# Altium PCB PCB2.PcbDoc
Units mil, origin at the board's own origin, x right, y up, seen from the top; angles counter-clockwise.
Board outline 6000 x 4000 mil, 2 copper layers (Top Layer, Bottom Layer); 14 components, 22 nets, 28 pads, 0 vias.
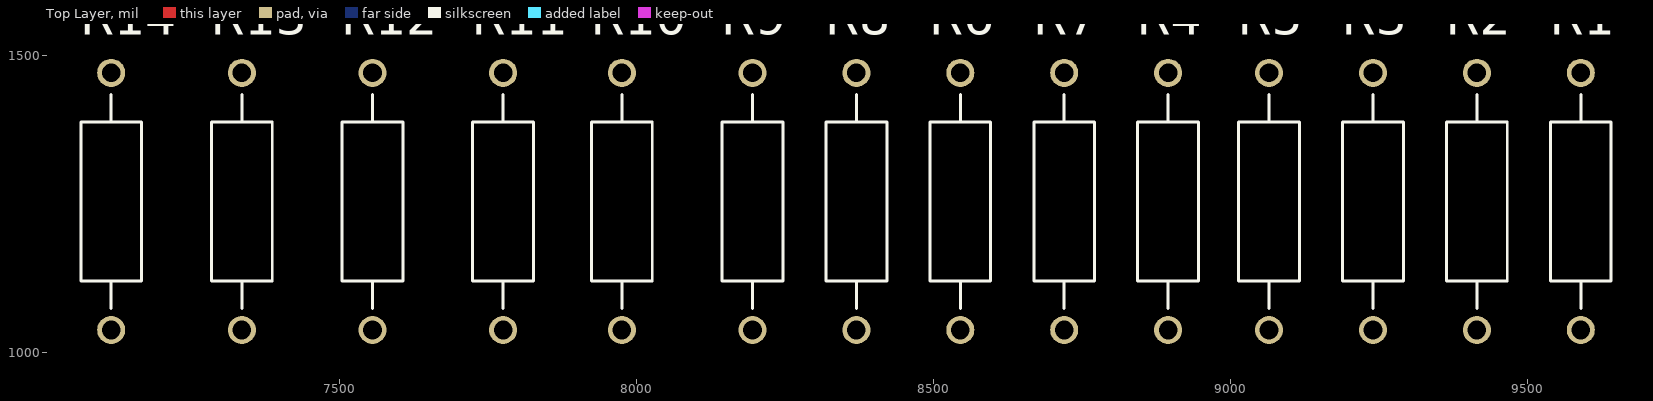
[diagram p0: Top Layer view]
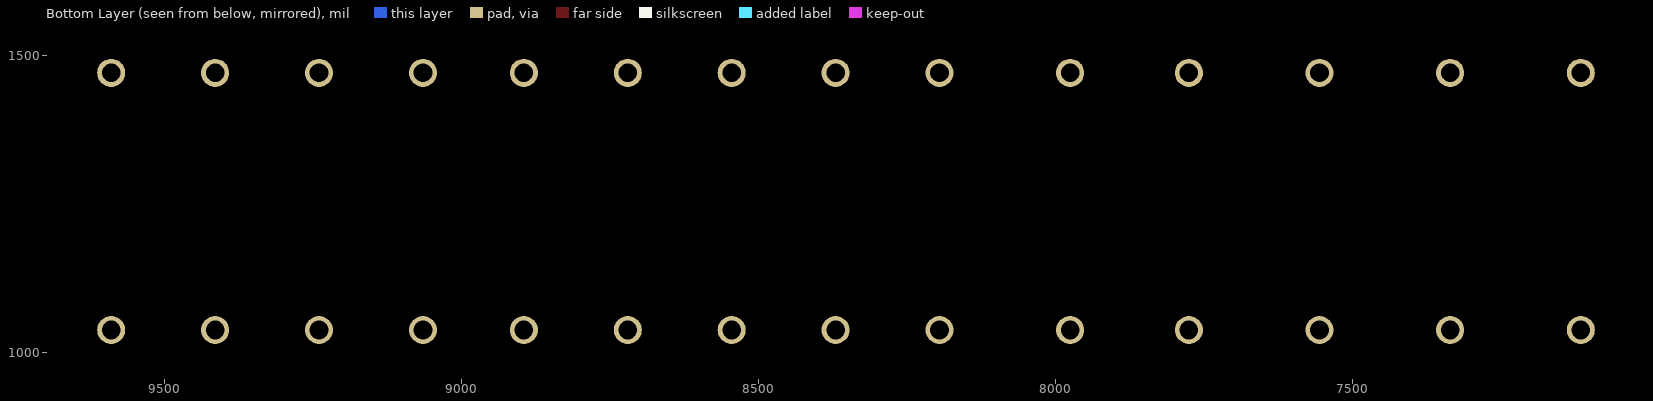
[diagram p1: Bottom Layer view, seen from below]

## Layer stack, top to bottom
Top Solder: solder mask 0.4, Solder Resist, Dk 3.5
Top Layer: signal copper 1.4
Dielectric 1: dielectric 12.6, FR-4, Dk 4.8
Bottom Layer: signal copper 1.4
Bottom Solder: solder mask 0.4, Solder Resist, Dk 3.5

## Board outline
1000,1000 7000,1000 7000,5000 1000,5000

## Design rules (kind name [scope] priority, off if disabled: settings)
Clearance [All] p1: gap=10 ignorepadtopadclearanceinfootprint=FALSE
PolygonConnect [All] p1: connectstyle=Relief reliefconductorwidth=10 reliefentries=4 polygonreliefangle="90 Angle" airgapwidth=10
RoutingVias [All] p1: holewidth=28 width=50 viastyle="Through Hole" minholewidth=28 minwidth=50 maxholewidth=28 maxwidth=50
SolderMaskExpansion [All] p1: expansion=4 istentingtop=FALSE
SupplyNets "Schematic Supply Nets" [InNet('12+')] p1: voltage=0.000
Width [All] p1: maxlimit=10 minlimit=10 preferedwidth=10
30 further rules are at their usual default settings.

## Components (designator, comment, footprint, x,y, rotation, side; value= is the part's Value field where it differs from the comment)
R1 "14.3" RESAD1100W55L680D260 9590,1255 r90 top
R2 "10k" RESAD1100W55L680D260 9415,1255 r90 top
R3 "1.5" RESAD1100W55L680D260 9240,1255 r90 top
R4 "10k" RESAD1100W55L680D260 8895,1255 r90 top
R5 "10k" RESAD1100W55L680D260 9065,1255 r90 top
R6 "330" RESAD1100W55L680D260 8545,1255 r90 top
R7 "330" RESAD1100W55L680D260 8720,1255 r90 top
R8 "MFR-25FBF52-10K" RESAD1100W55L680D260 8370,1255 r90 top
R9 "MFR-25FBF52-10K" RESAD1100W55L680D260 8195,1255 r90 top
R10 "MFR-25FBF52-10K" RESAD1100W55L680D260 7975,1255 r90 top
R11 "4.7k" RESAD1100W55L680D260 7775,1255 r90 top
R12 "MFR-25FBF52-10K" RESAD1100W55L680D260 7555,1255 r90 top
R13 "4.7k" RESAD1100W55L680D260 7335,1255 r90 top
R14 "1k" RESAD1100W55L680D260 7115,1255 r90 top

## Footprints (in the part's own frame and the unit in brackets; to place one, negate y for a bottom-side part, rotate by r counter-clockwise, add the part's x,y. Pads: shape width x height; smd on the part's side, far side on the other; paste and mask are expansions set on the pad)
RESAD1100W55L680D260 [mm]
  round 1.2 hole 0.8: 1(-5.5,0) 2(5.5,0)
  silkscreen extent -4.58,-1.3 4.58,1.3, body extent -5.77,-1.2 5.77,1.2, height 2.4

## Part data
R1 R2 R3 R4 R5 R6 R7 R11 R13 R14: library part MFR-25FBF52-10K, "10.2 kOhms Â±1% 0.25W, 1/4W Through Hole Resistor Axial - Metal Film", Package="RADIAL-2 YAGEO", Check_prices=https://www.snapeda.com/parts/MFR-25FBF52-10K/Yageo/view-part/?ref=eda, MF=Yageo, MP=MFR-25FBF52-10K, SnapEDA_Link=https://www.snapeda.com/parts/MFR-25FBF52-10K/Yageo/view-part/?ref=snap
R8 R9 R10 R12: "10.2 kOhms Â±1% 0.25W, 1/4W Through Hole Resistor Axial - Metal Film", Package="RADIAL-2 YAGEO", Check_prices=https://www.snapeda.com/parts/MFR-25FBF52-10K/Yageo/view-part/?ref=eda, MF=Yageo, MP=MFR-25FBF52-10K, SnapEDA_Link=https://www.snapeda.com/parts/MFR-25FBF52-10K/Yageo/view-part/?ref=snap

## Nets (pads, with @x,y where several pads share a name; then routed paths per layer and width w, separated by ;. In a path a pad name is that pad's centre, name@x,y a point inside that pad or via, vN(x,y) a via of type N, cw(c..) or ccw(c..) an arc to the next point about the centre after c; other vN are vias at no path point)
3.3+: 
3.3V: 
8.4+: 
12+: 
"Control piston": 
Control_S1: 
Control_S2: 
D+: 
D-: 
NetC1_1: 
NetD1_4: 
NetF1_2: 
NetLED1_K: 
NetLED2_K: 
NetLED3_A: 
NetLED4_A: 
NetLED5_A: 
NetLED6_A: 
NetQ1_1: 
NetQ4_2: 
NetQ4_3: 
NetR11_2: 
pads on no net: R1.1 R1.2 R2.1 R2.2 R3.1 R3.2 R4.1 R4.2 R5.1 R5.2 R6.1 R6.2 R7.1 R7.2 R8.1 R8.2 R9.1 R9.2 R10.1 R10.2 R11.1 R11.2 R12.1 R12.2 R13.1 R13.2 R14.1 R14.2